# Altium PCB FirstProject.PcbDoc
Units mm, origin at the board's own origin, x right, y up, seen from the top; angles counter-clockwise.
Board outline 112.14 x 57.53 mm, 2 copper layers (Top Layer, Bottom Layer); 22 components, 5 nets, 72 pads, 96 vias.
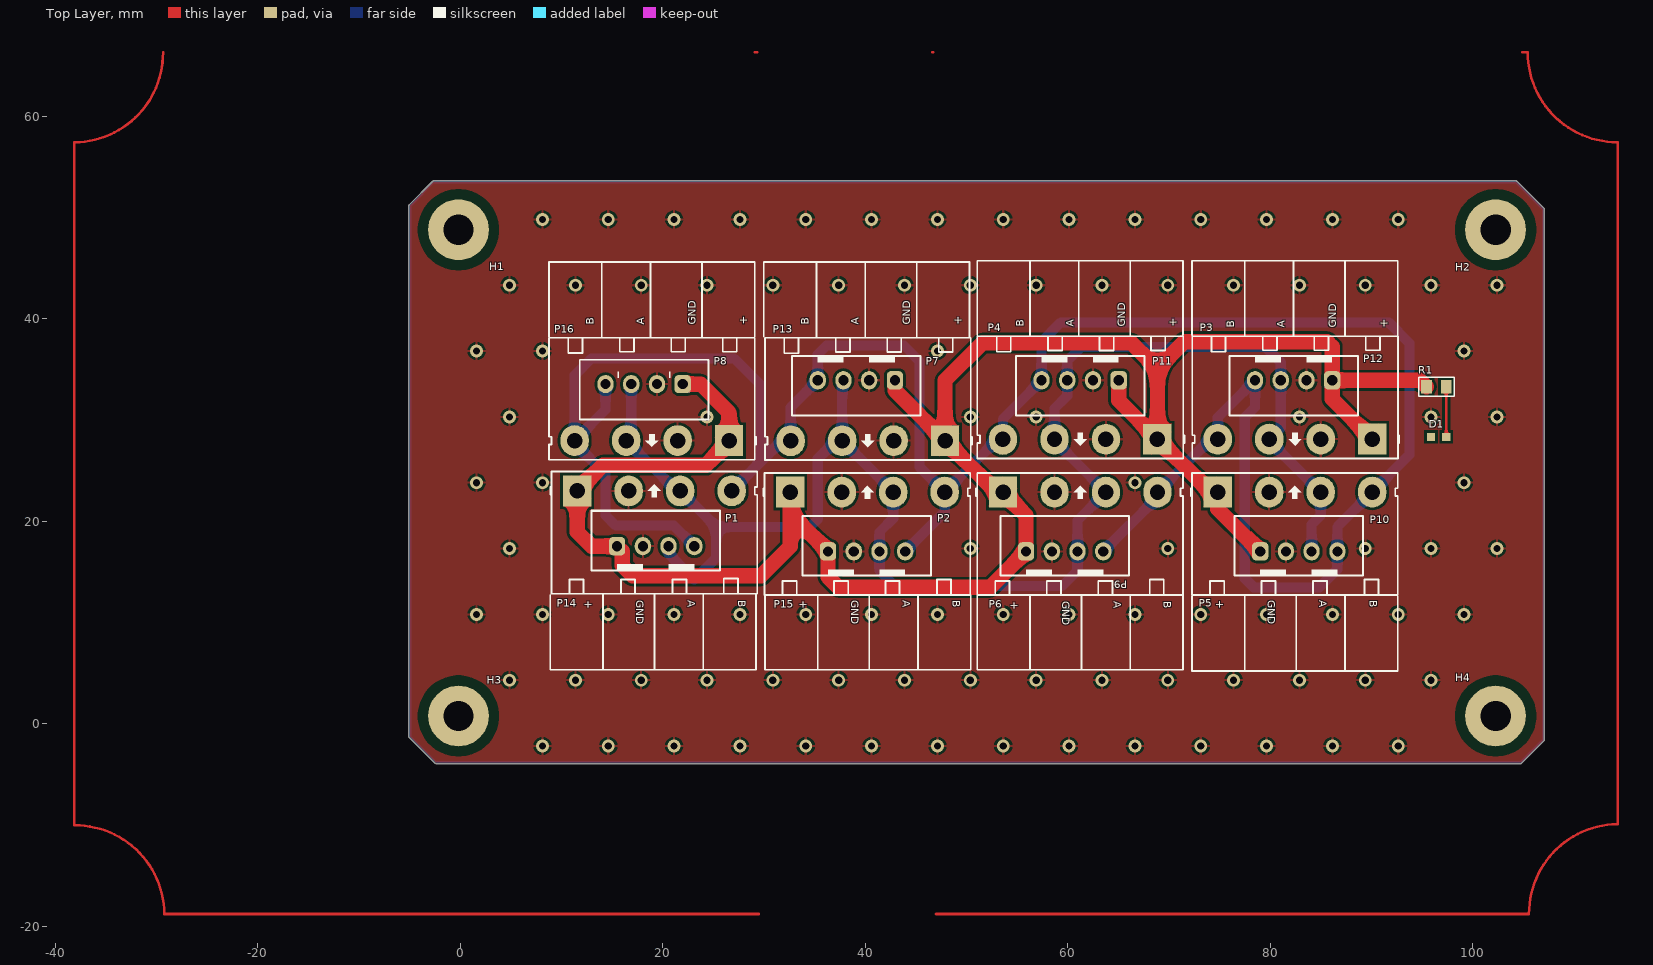
[diagram p0: Top Layer view]
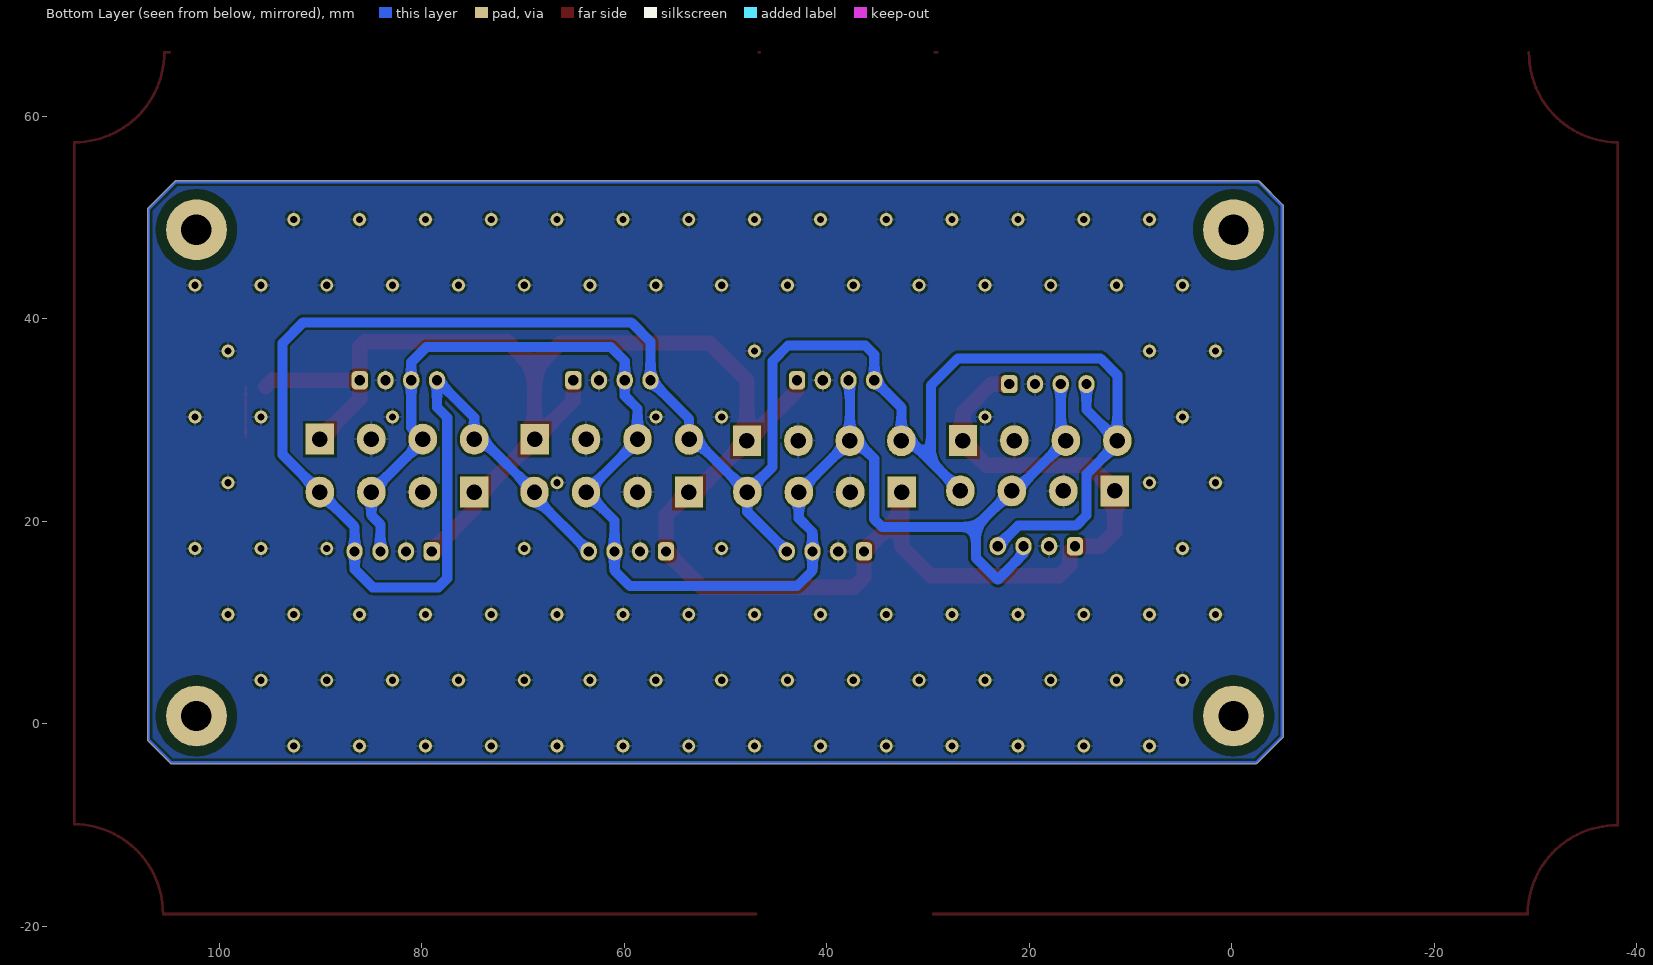
[diagram p1: Bottom Layer view, seen from below]

## Layer stack, top to bottom
Top Solder: solder mask 0.0102, Solder Resist, Dk 3.5
Top Layer: signal copper 0.0356
Dielectric 1: dielectric 0.32, FR-4, Dk 4.8
Bottom Layer: signal copper 0.0356
Bottom Solder: solder mask 0.0102, Solder Resist, Dk 3.5

## Board outline
-5.043,-1.343 cw(c-4.953,-1.252) -5.08,-1.252 -5.08,51.129 cw(c-4.953,51.129) -5.043,51.22 -5.043,51.219 -2.705,53.557 -2.706,53.557 cw(c-2.615,53.467) -2.615,53.594 104.262,53.594 cw(c104.262,53.467) 104.352,53.557 107.024,50.885 cw(c106.934,50.795) 107.061,50.795 107.061,0.254 107.061,-1.592 cw(c106.934,-1.592) 107.024,-1.683 107.024,-1.682 104.806,-3.9 104.807,-3.9 cw(c104.716,-3.81) 104.716,-3.937 -2.395,-3.937 cw(c-2.395,-3.81) -2.486,-3.9 -2.485,-3.9

## Design rules (kind name [scope] priority, off if disabled: settings)
Clearance [All] p1: gap=0.254 ignorepadtopadclearanceinfootprint=FALSE except(0: Arc-Hole Track-Hole SMDPad-Hole THPad-Hole Via-Hole Fill-Hole Poly-Hole Region-Hole Text-Hole)
PolygonConnect [All] p1: connectstyle=Relief reliefconductorwidth=0.254 reliefentries=4 polygonreliefangle="90 Angle" airgapwidth=0.254
RoutingVias [All] p1: holewidth=0.711 width=1.27 viastyle="Through Hole" minholewidth=0.711 minwidth=1.27 maxholewidth=0.711 maxwidth=1.27
SolderMaskExpansion [All] p1: expansion=0.102
Width [All] p1: maxlimit=0.254 minlimit=0.254 preferedwidth=0.254
30 further rules are at their usual default settings.

## Components (designator, comment, footprint, x,y, rotation, side; value= is the part's Value field where it differs from the comment)
D1 "Led" "Led 0603 - red" 96.618,28.321 r180 top
H1 "Screw Hole" SCREW/3.0/6.0 -0.168,48.768 r0 top locked
H2 "Screw Hole" SCREW/3.0/6.0 102.235,48.768 r0 top locked
H3 "Screw Hole" SCREW/3.0/6.0 -0.168,0.762 r0 top locked
H4 "Screw Hole" SCREW/3.0/6.0 102.235,0.762 r0 top locked
P1 "Header 4" HDR/Header/4/BOX 19.304,17.526 r0 top
P2 "Header 4" HDR/Header/4/BOX 40.132,17.018 r0 top
P3 "Header 4" HDR/Terminal/4/RA 82.428,28.094 r180 top
P4 "Header 4" HDR/Terminal/4/RA 61.219,28.084 r180 top
P5 "Header 4" HDR/Terminal/4/RA 82.428,22.865 r0 top
P6 "Header 4" HDR/Terminal/4/RA 61.227,22.863 r0 top
P7 "Header 4" HDR/Header/4/BOX 39.116,33.909 r180 top
P8 "Header 4" HDR/Header/4/BOX 18.161,33.528 r180 top
P9 "Header 4" HDR/Header/4/BOX 59.69,17.018 r0 top
P10 "Header 4" HDR/Header/4/BOX 82.804,17.018 r0 top
P11 "Header 4" HDR/Header/4/BOX 61.214,33.909 r180 top
P12 "Header 4" HDR/Header/4/BOX 82.296,33.909 r180 top
P13 "Header 4" HDR/Terminal/4/RA 40.256,27.937 r180 top
P14 "Header 4" HDR/Terminal/4/RA 19.18,22.99 r0 top
P15 "Header 4" HDR/Terminal/4/RA 40.219,22.865 r0 top
P16 "Header 4" HDR/Terminal/4/RA 18.928,27.95 r180 top
R1 "10k" "R 0805" 96.393,33.274 r0 top

## Footprints (in the part's own frame and the unit in brackets; to place one, negate y for a bottom-side part, rotate by r counter-clockwise, add the part's x,y. Pads: shape width x height; smd on the part's side, far side on the other; paste and mask are expansions set on the pad)
HDR/Header/4/BOX [mm]
  rrect50% 1.6x1.8 hole 1: 1(-3.81,0)
  oval 1.6x1.8 hole 1: 2(-1.27,0) 3(1.27,0) 4(3.81,0)
  silkscreen extent -6.35,-2.41 6.35,3.5, body extent -6.25,-2.3 6.25,3.4, height 7
HDR/Terminal/4/RA [mil] "Header 4, 4 pin, hight 300mil, Pin to Pin 200, Colour Green"
  rect 110x120 hole 60: 1(-300.2,-0.2)
  oval 110x120 hole 60: 2(-100.2,-0.2) 3(99.87,-0.13) 4(300.2,0.2)
  silkscreen extent -405,-400 400,75, body extent -390,-403 392,70, height 334
"Led 0603 - red" [mm]
  rect 0.8x0.8 smd: 1(-0.75,0) 2(0.75,0)
  body extent -0.81,-0.4 0.81,0.4, height 0.6
"R 0805" [mm] "Chip Resistor, 2-Leads, Body 2.0x1.3mm, IPC Medium Density"
  rect 1.05x1.35 smd: 1(-0.975,0) 2(0.975,0)
  silkscreen extent -1.75,-0.92 1.75,0.92, body extent -1,-0.61 1,0.59, height 0.5
SCREW/3.0/6.0 [mm]
  round 6 hole 3: 1(0,0)
  Top Layer pour cut-out: -4,0 -3.696,1.531 -2.828,2.828 -1.531,3.695 0,4 0,4 1.531,3.695 2.828,2.828 3.695,1.531 4,0 4,0 3.696,-1.531 2.828,-2.828 1.531,-3.696 0,-4 0,-4 -1.531,-3.696 -2.828,-2.828 -3.696,-1.531 -4,0
  Bottom Layer pour cut-out: -4,0 -3.696,1.531 -2.828,2.828 -1.531,3.695 0,4 0,4 1.531,3.695 2.828,2.828 3.695,1.531 4,0 4,0 3.696,-1.531 2.828,-2.828 1.531,-3.696 0,-4 0,-4 -1.531,-3.696 -2.828,-2.828 -3.696,-1.531 -4,0

## Part data
D1: "Typical LED"
P1 P2 P3 P4 P5 P6 P7 P8 P9 P10 P11 P12 P13 P14 P15 P16: "Header, 4-Pin"
R1: library part Resistor, "Resistor"
H1 H2 H3 H4: TYPE=NO-BOM, UNIT PRICE=0

## Via types
v1: diameter 1.27, hole 0.711, Top Layer to Bottom Layer, tented both sides, 96 vias

## Nets (pads, with @x,y where several pads share a name; then routed paths per layer and width w, separated by ;. In a path a pad name is that pad's centre, name@x,y a point inside that pad or via, vN(x,y) a via of type N, cw(c..) or ccw(c..) an arc to the next point about the centre after c; other vN are vias at no path point)
+: P1.1 P2.1 P3.1 P4.1 P5.1 P6.1 P7.1 P8.1 P9.1 P10.1 P11.1 P12.1 P13.1 P14.1 P15.1 P16.1 R1.1 | length 210.3
  Top Layer w1.5: P8.1 23.749,33.528 26.553,30.724 P16.1 26.553,27.823 24.257,25.527 14.097,25.527 P14.1 11.555,18.925 12.954,17.526 P1.1 16.002,17.018 16.002,15.621 17.018,14.605 29.718,14.605 32.594,17.481 32.594,20.746 ; P15.1 32.594,20.746 ; P7.1 42.926,32.896 P13.1 ; P11.1 65.024,31.909 P4.1 ; P10.1 74.803,21.209 P5.1 74.073,22.86 P4.1 ; P3.1 86.106,32.046 P12.1 ; R1.1 94.783,33.909 P12.1 ; 32.594,20.746 P2.1 36.322,14.478 37.338,13.462 52.324,13.462 P9.1 55.88,20.581 P6.1 52.964,22.858 P13.1 ; P13.1 47.881,33.911 51.562,37.592 66.304,37.592 68.844,35.052 ; P4.1 68.844,35.052 ; 68.844,35.052 71.511,37.719 85.598,37.719 86.106,37.211 P12.1
A: P1.3 P2.3 P3.3 P4.3 P5.3 P6.3 P7.3 P8.3 P9.3 P10.3 P11.3 P12.3 P13.3 P14.3 P15.3 P16.3 | length 158.8
  Bottom Layer w1: P8.3 16.891,28.453 P16.3 21.358,22.987 P14.3 25.273,19.431 ; P1.3 20.574,16.764 23.114,14.224 25.273,16.383 25.273,19.431 ; P7.3 37.719,33.782 P13.3 ; P10.3 84.074,19.685 84.965,20.576 P5.3 79.891,27.935 P3.3 81.026,29.232 P12.3 81.026,35.687 79.502,37.211 61.341,37.211 59.944,35.814 P11.3 59.944,32.385 58.682,31.123 P4.3 58.682,27.942 P6.3 60.96,20.056 P9.3 60.96,15.113 59.436,13.589 42.926,13.589 41.402,15.113 P2.3 41.402,18.923 42.755,20.276 P15.3 42.755,22.904 P13.3 ; 25.273,19.431 34.544,19.431 35.306,20.193 35.306,26.162 37.084,27.94 P13.3
B: P1.4 P2.4 P3.4 P4.4 P5.4 P6.4 P7.4 P8.4 P9.4 P10.4 P11.4 P12.4 P13.4 P14.4 P15.4 P16.4 | length 245.8
  Bottom Layer w1: P8.4 14.351,30.993 P16.4 ; P1.4 21.082,19.558 15.367,19.558 14.351,20.574 14.351,24.638 11.303,27.686 P16.4 ; P14.4 29.718,25.908 ; P2.4 47.844,20.92 P15.4 ; P9.4 68.852,22.37 P6.4 74.073,28.089 P3.4 74.803,30.226 P12.4 78.486,31.242 77.47,30.226 77.47,14.351 78.359,13.462 84.836,13.462 86.614,15.24 P10.4 86.614,19.431 P5.4 93.726,26.543 93.726,37.592 91.694,39.624 59.309,39.624 57.404,37.719 P11.4 53.594,30.099 P4.4 53.052,28.079 P15.4 ; P16.4 11.303,34.417 12.954,36.068 27.051,36.068 29.718,33.401 29.718,25.908 ; 29.718,25.908 31.742,27.932 P13.4 32.631,31.234 P7.4 35.306,36.449 36.195,37.338 43.815,37.338 45.339,35.814 45.339,25.375 P15.4
GND: P1.2 P2.2 P3.2 P4.2 P5.2 P6.2 P7.2 P8.2 P9.2 P10.2 P11.2 P12.2 P13.2 P14.2 P15.2 P16.2
  other v1: 8.123,-2.206 14.623,-2.206 21.123,-2.206 27.623,-2.206 34.123,-2.206 40.623,-2.206 47.123,-2.206 53.623,-2.206 60.123,-2.206 66.623,-2.206 73.123,-2.206 79.623,-2.206 86.123,-2.206 92.623,-2.206 4.873,4.294 11.373,4.294 17.873,4.294 24.373,4.294 30.873,4.294 37.373,4.294 43.873,4.294 50.373,4.294 56.873,4.294 63.373,4.294 69.873,4.294 76.373,4.294 82.873,4.294 89.373,4.294 95.873,4.294 1.623,10.794 8.123,10.794 14.623,10.794 21.123,10.794 27.623,10.794 34.123,10.794 40.623,10.794 47.123,10.794 53.623,10.794 60.123,10.794 66.623,10.794 73.123,10.794 79.623,10.794 86.123,10.794 92.623,10.794 99.123,10.794 4.873,17.294 50.373,17.294 69.873,17.294 89.373,17.294 95.873,17.294 102.373,17.294 1.623,23.794 8.123,23.794 66.623,23.794 99.123,23.794 4.873,30.294 24.373,30.294 50.373,30.294 56.873,30.294 82.873,30.294 95.873,30.294 102.373,30.294 1.623,36.794 8.123,36.794 47.123,36.794 99.123,36.794 4.873,43.294 11.373,43.294 17.873,43.294 24.373,43.294 30.873,43.294 37.373,43.294 43.873,43.294 50.373,43.294 56.873,43.294 63.373,43.294 69.873,43.294 76.373,43.294 82.873,43.294 89.373,43.294 95.873,43.294 102.373,43.294 8.123,49.794 14.623,49.794 21.123,49.794 27.623,49.794 34.123,49.794 40.623,49.794 47.123,49.794 53.623,49.794 60.123,49.794 66.623,49.794 73.123,49.794 79.623,49.794 86.123,49.794 92.623,49.794
NetD1_1: D1.1 R1.2 | length 5
  Top Layer w0.254: D1.1 R1.2
pads on no net: D1.2 H1.1 H2.1 H3.1 H4.1
copper on no net: | length 644.4
  Top Layer w0.254: -29.341,66.294 cw(c-38.168,66.23) -38.104,57.404 -38.104,-10.033 cw(c-38.041,-18.86) -29.214,-18.796 29.46,-18.796 ; 29.079,66.294 29.333,66.294 ; 46.605,66.294 46.732,66.294 ; 46.986,-18.796 105.025,-18.796 105.533,-18.796 cw(c114.423,-18.796) 114.294,-9.907 ; 104.898,66.294 105.406,66.294 ccw(c114.296,66.294) 114.296,57.404 ; 114.296,-9.906 114.296,57.404 ; 114.296,57.15 114.296,57.404
  Bottom Layer w0.254: -4.826,51.256 -2.615,53.467 ; -2.615,53.467 -4.953,51.129 -4.953,-1.252 -2.395,-3.81 104.716,-3.81 106.934,-1.592 106.934,0.254 106.934,50.795 104.262,53.467 -2.615,53.467

## Polygon pours and split planes (outlines as drawn)
GND on Bottom Layer "GND_L02_P092" (solid, pour order 92): -4.953,51.129 -4.878,51.129 -2.54,53.467 104.262,53.467 106.934,50.795 106.934,-1.592 104.716,-3.81 -2.395,-3.81 -4.953,-1.252
GND on Bottom Layer "GND_L02_P090" (solid, pour order 90): -4.953,51.129 -2.615,53.467 104.262,53.467 106.934,50.795 106.934,-1.592 104.716,-3.81 -2.395,-3.81 -4.953,-1.252
GND on Bottom Layer "GND_L02_P086" (solid, pour order 86): -4.953,51.129
GND on Bottom Layer "GND_L02_P070" (solid, pour order 70): 126.746,29.464
no net on Bottom Layer "Bottom Layer-No Net 2" (solid, pour order 10): 39.747,48.133
no net on Bottom Layer "Bottom Layer-No Net 3" (solid, pour order 8): 31.746,47.752
no net on Bottom Layer "Bottom Layer-No Net 4" (solid, pour order 4): 71.243,47.625
GND on Top Layer "GND_L01_P082" (solid, pour order 82): -4.953,51.181 -2.667,53.467 104.267,53.467 106.934,50.8 106.934,-1.651 104.775,-3.81 -2.413,-3.81 -4.953,-1.27
GND on Top Layer "GND_L01_P078" (solid, pour order 78): 91.059,49.403
no net on Top Layer "NONET_L01_P066" (solid, pour order 66): 78.486,5.842
no net on Top Layer "NONET_L01_P064" (solid, pour order 64): 57.277,5.969
no net on Top Layer "NONET_L01_P062" (solid, pour order 62): 36.322,5.969
no net on Top Layer "NONET_L01_P060" (solid, pour order 60): 86.347,45.085
no net on Top Layer "NONET_L01_P058" (solid, pour order 58): 65.151,45.085
no net on Top Layer "NONET_L01_P056" (solid, pour order 56): 44.069,44.958
no net on Top Layer "NONET_L01_P052" (solid, pour order 52): 35.687,5.969
no net on Top Layer "NONET_L01_P050" (solid, pour order 50): 15.113,5.969
GND on Top Layer "GND_L01_P042" (solid, pour order 42): 22.86,44.958
GND on Top Layer "GND_L01_P040" (solid, pour order 40): 129.286,57.912

## Silkscreen, mask and mechanical layers (free items; w line width, h text height)
Top Overlay:
  lines w0.17: 8.763,38.224 8.763,45.593 13.589,45.593 13.97,45.593 ; 8.89,12.703 8.89,5.334 14.097,5.334 ; 13.97,38.224 13.97,45.593 ; 14.097,12.7 14.097,5.334 ; 18.796,38.227 18.796,45.593 ; 19.177,12.7 19.177,5.334 ; 23.876,38.227 23.876,45.593 ; 24.003,12.703 24.003,5.334 ; 29.083,38.224 29.083,45.593 23.876,45.593 ; 29.21,12.703 29.21,5.334 24.384,5.334 24.003,5.334 ; 29.972,38.224 29.972,45.593 34.798,45.593 35.179,45.593 ; 30.099,12.703 30.099,5.334 35.306,5.334 ; 35.179,38.224 35.179,45.593 ; 35.306,12.7 35.306,5.334 ; 40.005,38.227 40.005,45.593 ; 40.386,12.7 40.386,5.334 ; 45.085,38.227 45.085,45.593 ; 45.212,12.703 45.212,5.334 ; 50.292,38.224 50.292,45.593 45.085,45.593 ; 50.419,12.703 50.419,5.334 45.593,5.334 45.212,5.334 ; 51.054,12.703 51.054,5.334 56.261,5.334 ; 51.054,38.351 51.054,45.72 55.88,45.72 56.261,45.72 ; 56.261,12.7 56.261,5.334 ; 56.261,38.351 56.261,45.72 ; 61.087,38.354 61.087,45.72 ; 61.341,12.7 61.341,5.334 ; 66.167,12.703 66.167,5.334 ; 66.167,38.354 66.167,45.72 ; 71.374,12.703 71.374,5.334 66.548,5.334 66.167,5.334 ; 71.374,38.351 71.374,45.72 66.167,45.72 ; 72.25,38.351 72.25,45.72 77.076,45.72 77.457,45.72 ; 72.263,12.576 72.263,5.207 77.47,5.207 ; 77.457,38.351 77.457,45.72 ; 77.47,12.573 77.47,5.207 ; 82.283,38.354 82.283,45.72 ; 82.55,12.573 82.55,5.207 ; 87.363,38.354 87.363,45.72 ; 87.376,12.576 87.376,5.207 ; 92.57,38.351 92.57,45.72 87.363,45.72 ; 92.583,12.576 92.583,5.207 87.757,5.207 87.376,5.207 ; 13.97,45.593 18.796,45.593 ; 14.097,5.334 19.177,5.334 ; 18.796,45.593 23.876,45.593 ; 19.177,5.334 24.003,5.334 ; 35.179,45.593 40.005,45.593 ; 35.306,5.334 40.386,5.334 ; 40.005,45.593 45.085,45.593 ; 40.386,5.334 45.212,5.334 ; 56.261,5.334 61.341,5.334 ; 56.261,45.72 61.087,45.72 ; 61.087,45.72 66.167,45.72 ; 61.341,5.334 66.167,5.334 ; 77.457,45.72 82.283,45.72 ; 77.47,5.207 82.55,5.207 ; 82.283,45.72 87.363,45.72 ; 82.55,5.207 87.376,5.207
  text "B" at 13.208,39.37 h0.76 r90
  text "A" at 18.161,39.37 h0.76 r90
  text "GND" at 23.241,39.37 h0.76 r90
  text "+" at 28.321,39.37 h0.76 r90
  text "B" at 34.417,39.37 h0.76 r90
  text "A" at 39.37,39.37 h0.76 r90
  text "GND" at 44.45,39.37 h0.76 r90
  text "+" at 49.53,39.37 h0.76 r90
  text "B" at 55.626,39.207 h0.76 r90
  text "A" at 60.579,39.207 h0.76 r90
  text "GND" at 65.659,39.207 h0.76 r90
  text "+" at 70.739,39.207 h0.76 r90
  text "B" at 76.454,39.116 h0.76 r90
  text "A" at 81.407,39.116 h0.76 r90
  text "GND" at 86.487,39.116 h0.76 r90
  text "+" at 91.567,39.116 h0.76 r90
  text "+" at 12.319,12.192 h0.76 r270
  text "GND" at 17.399,12.192 h0.76 r270
  text "A" at 22.479,12.192 h0.76 r270
  text "B" at 27.432,12.192 h0.76 r270
  text "+" at 33.528,12.192 h0.76 r270
  text "GND" at 38.608,12.192 h0.76 r270
  text "A" at 43.688,12.192 h0.76 r270
  text "B" at 48.641,12.192 h0.76 r270
  text "+" at 74.676,12.192 h0.76 r270
  text "GND" at 79.756,12.192 h0.76 r270
  text "A" at 84.836,12.192 h0.76 r270
  text "B" at 89.789,12.192 h0.76 r270
  text "+" at 54.356,12.065 h0.76 r270
  text "GND" at 59.436,12.065 h0.76 r270
  text "A" at 64.516,12.065 h0.76 r270
  text "B" at 69.469,12.065 h0.76 r270
Drill Drawing:
  lines w0.254: -29.341,66.294 29.333,66.294 ccw(c37.969,66.421) 46.605,66.294 105.406,66.294 ; 29.461,-18.796 cw(c38.223,-18.669) 46.985,-18.796